# EAGLE board Applesiini (EAGLE 7.4.0)
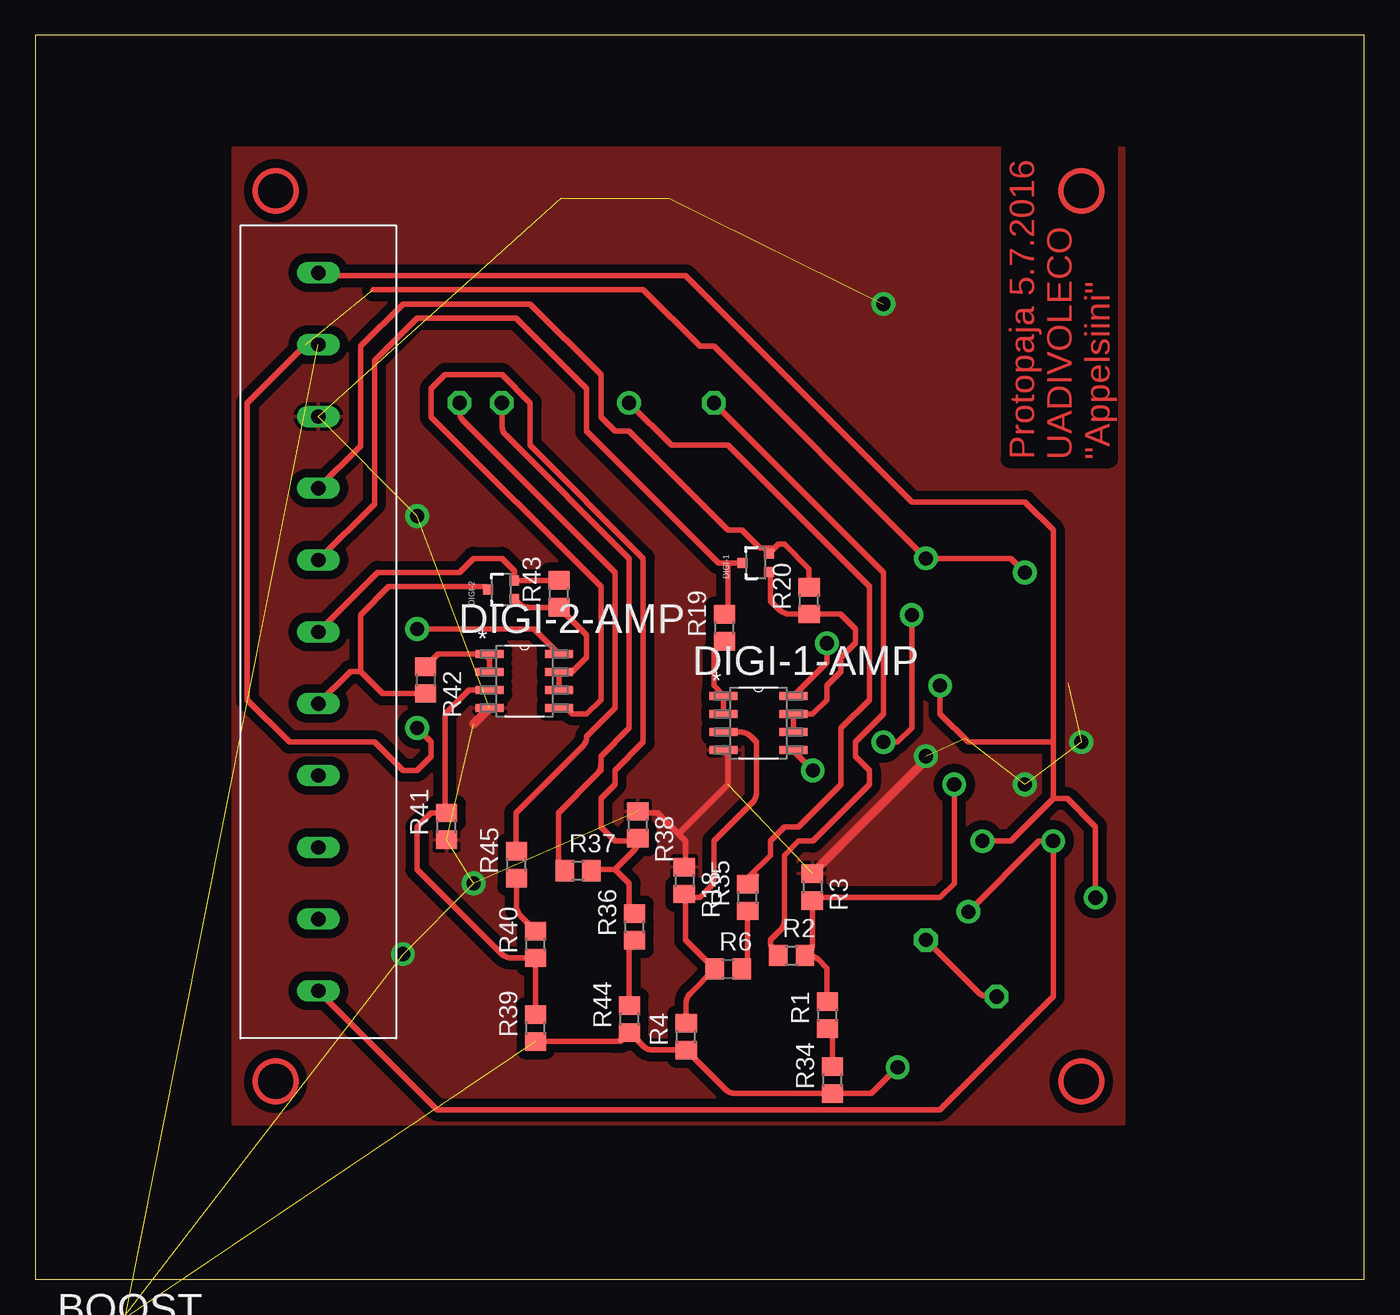
[diagram p0: board, top side]
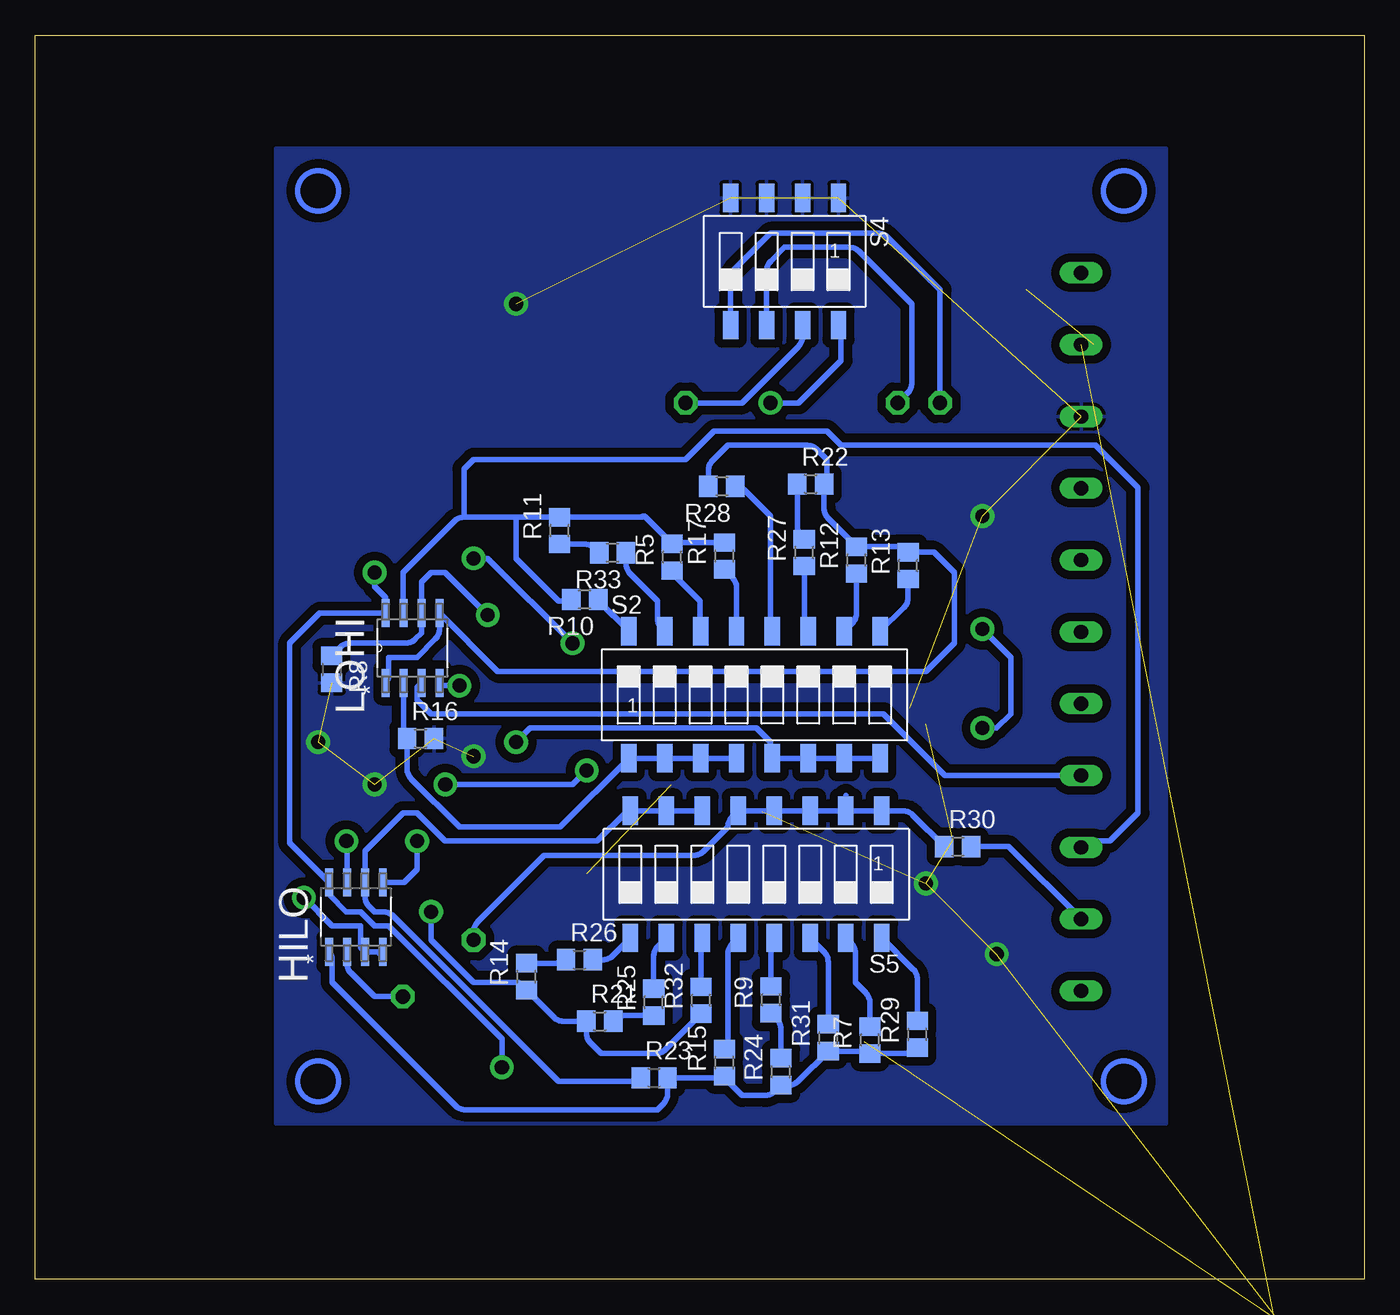
[diagram p1: board, bottom side, seen from below]

Size 94 x 88 mm. Coordinates in mm from the lower left corner, seen from the top.
Outline: 0,0 94,0 94,88 0,88 0,0
Copper layers (1*16): Top 0.035mm / dielectric 1.5mm / Bottom 0.035mm
Design rules "default": minimum track width 10mil, minimum drill 24mil, track to track 8mil, track to pad 8mil, pad to pad 8mil, via to via 8mil, smd to smd 8mil, copper to edge 40mil, drill to drill 8mil, minimum pad ring 10mil, minimum via ring 8mil, stop-mask expansion 4mil, vias tented up to drill 0mil, thermal gap 10mil

## Footprints (pad centres in the part's own frame; a part is rotated, then mirrored left to right if it is on the bottom)
SON65P210X210X80-7N = smd 0.61 x 0.356: 1 -1.041,0.66; 2 -1.041,0; 3 -1.041,-0.66; 4 1.041,-0.66; 5 1.041,0; 6 1.041,0.66 | smd 0.991 x 1.6: 7 0,0
C1206 = smd 1.6 x 1.8: 1 -1.4,0; 2 1.4,0
C0805 = smd 1.3 x 1.5: 1 -0.95,0; 2 0.95,0
SOD123 = smd 1.4 x 1.4: A 1.9,0; C -1.9,0
SOT323 = smd 0.7 x 0.7: 1 -0.65,-0.925; 2 0.65,-0.925; 3 0,0.925
SOIC127P600X175-8N = smd 1.981 x 0.559: 1 -2.464,1.905; 2 -2.464,0.635; 3 -2.464,-0.635; 4 -2.464,-1.905; 5 2.464,-1.905; 6 2.464,-0.635; 7 2.464,0.635; 8 2.464,1.905
SRN6045 = smd 2.5 x 6: 1 -2.175,-0.175; 2 2.125,-0.175
R0805 = smd 1.3 x 1.5: 1 -0.95,0; 2 0.95,0
SMS-008 = smd 1.092 x 2.007: 1 -8.89,-4.496; 2 -6.35,-4.496; 3 -3.81,-4.496; 4 -1.27,-4.496; 5 1.27,-4.496; 6 3.81,-4.496; 7 6.35,-4.496; 8 8.89,-4.496; 9 8.89,4.496; 10 6.35,4.496; 11 3.81,4.496; 12 1.27,4.496; 13 -1.27,4.496; 14 -3.81,4.496; 15 -6.35,4.496; 16 -8.89,4.496
SMS-004 = smd 1.092 x 2.007: 1 -3.81,-4.496; 2 -1.27,-4.496; 3 1.27,-4.496; 4 3.81,-4.496; 5 3.81,4.496; 6 1.27,4.496; 7 -1.27,4.496; 8 -3.81,4.496
10KPL508 = drill 1 long: P$1 -20.32,0; P$2 -15.24,0; P$3 -10.16,0; P$4 -5.08,0; P$5 0,0; P$6 5.08,0; P$7 10.16,0; P$8 15.24,0; P$9 20.32,0; P$10 25.4,0; P$11 -25.4,0

## Placement (x,y rotation side)
BOOST  TPS61170DRVT  [SON65P210X210X80-7N]  5,-5 0 top  (outside the outline)
C1  [C1206]  3,-13 0 top  (outside the outline)
C2  [C0805]  2,-17 0 top  (outside the outline)
C3  [C1206]  3,-21 0 top  (outside the outline)
C4  [C1206]  3,-25 0 top  (outside the outline)
C5  [C0805]  2,-29 0 top  (outside the outline)
D1  [SOD123]  -5,-45 0 top  (outside the outline)
DIGI-1  MOSFET-NCHANNEL2N7002PW  [SOT323]  50.96,50.68 90 top
DIGI-1-AMP  LM358DR  [SOIC127P600X175-8N]  51.15,39.35 0 top
DIGI-2  MOSFET-NCHANNEL2N7002PW  [SOT323]  32.96,48.79 90 top
DIGI-2-AMP  LM358DR  [SOIC127P600X175-8N]  34.6,42.32 0 top
HILO  LM358DR  [SOIC127P600X175-8N]  71.32,25.63 90 bottom
L1  22uH  [SRN6045]  -4,-36 0 top  (outside the outline)
LOHI  LM358DR  [SOIC127P600X175-8N]  67.32,44.66 90 bottom
R1  1k  [R0805]  56.04,18.69 90 top
R2  15k4  [R0805]  53.49,22.91 0 top
R3  10k  [R0805]  54.96,27.75 270 top
R4  10k  [R0805]  46.04,17.17 90 top
R5  30k  [R0805]  48.96,51.09 90 bottom
R6  9k1  [R0805]  49.01,21.96 0 top
R7  7k5  [R0805]  34.96,16.93 90 bottom
R8  10k  [R0805]  73.04,43.15 270 bottom
R9  8k2  [R0805]  41.96,19.77 90 bottom
R10  120k  [R0805]  55.14,48.09 180 bottom
R11  56k  [R0805]  56.91,52.96 90 bottom
R12  30k  [R0805]  35.91,50.88 90 bottom
R13  20  [R0805]  32.26,50.49 90 bottom
R14  1k  [R0805]  59.26,21.41 90 bottom
R15  30k  [R0805]  45.26,15.33 90 bottom
R16  10k  [R0805]  66.75,38.26 0 bottom
R17  24k  [R0805]  45.26,51.17 90 bottom
R18  240k  [R0805]  45.91,28.21 270 top
R19  10k  [R0805]  48.74,46.09 90 top
R20  10k  [R0805]  54.74,48.01 90 top
R21  3k9  [R0805]  54.07,18.26 0 bottom
R22  3k  [R0805]  39.15,56.26 0 bottom
R23  10k  [R0805]  50.23,14.26 0 bottom
R24  390  [R0805]  41.26,14.69 90 bottom
R25  56k  [R0805]  50.26,19.61 90 bottom
R26  39k  [R0805]  55.51,22.61 0 bottom
R27  47k  [R0805]  39.61,51.41 90 bottom
R28  110k  [R0805]  45.44,56.09 180 bottom
R29  15k  [R0805]  31.61,17.33 90 bottom
R30  10k  [R0805]  28.75,30.61 0 bottom
R31  120k  [R0805]  37.91,17.09 90 bottom
R32  120k  [R0805]  46.91,19.74 90 bottom
R33  3k9  [R0805]  53.17,51.39 180 bottom
R34  39k  [R0805]  56.39,14.09 90 top
R35  300  [R0805]  50.39,27.01 90 top
R36  1k  [R0805]  42.39,24.93 90 top
R37  15k4  [R0805]  38.39,28.91 0 top
R38  10k  [R0805]  42.61,32.15 270 top
R39  10k  [R0805]  35.39,17.77 90 top
R40  9k1  [R0805]  35.39,23.69 90 top
R41  240k  [R0805]  29.09,32.04 90 top
R42  10k  [R0805]  27.61,42.39 270 top
R43  10k  [R0805]  37.04,48.49 90 top
R44  39k  [R0805]  42.04,18.41 90 top
R45  300  [R0805]  34.04,29.33 90 top
R46  [R0805]  2,-33 0 top  (outside the outline)
R47  [R0805]  2,-37 0 top  (outside the outline)
R48  [R0805]  2,-41 0 top  (outside the outline)
S2  SWS008  [SMS-008]  43.13,41.35 0 bottom
S4  SWS004  [SMS-004]  41,72 180 bottom
S5  SWS008  [SMS-008]  43.01,28.65 180 bottom
U$1  5.08PITCHTERMINAL  [10KPL508]  20.02,45.8 270 top

## Library data of the parts
BOOST = Texas Instruments_By_element14_Batch_1; MPN: TPS61170DRVT; OC_FARNELL: 1703404; OC_NEWARK: 65M6342; PACKAGE: SON-6; SUPPLIER: Texas Instruments
C1-C5 R1-R48 = rcl
D1 = diode
DIGI-1 DIGI-2 = SparkFun-DiscreteSemi; PROD_ID: TRANS-11151
DIGI-1-AMP DIGI-2-AMP HILO LOHI = Texas Instruments_By_element14_Batch_1; MPN: LM358DR; OC_FARNELL: 1831865; OC_NEWARK: 34K7599; PACKAGE: SOIC-8; SUPPLIER: Texas Instruments
L1 = SparkFun-Passives; PROD_ID: NDUC-11627
S2 S4 S5 = smd-special
U$1 = ruuviliitin

## Nets
+5V: BOOST.5 BOOST.6 C2.1 L1.2 U$1.P$1
A_HI-LO_IN: R30.2 U$1.P$9
A_HI-LO_OUT: HILO.7 R14.1 R21.1 R32.1 U$1.P$10
A_LO-HI_IN: LOHI.3 U$1.P$7
A_LO-HI_OUT: LOHI.7 R5.2 R10.2 R11.2 R17.2 U$1.P$8
DI-1: DIGI-1-AMP.1 DIGI-1-AMP.2 R19.1
DIGI_HIGH_1: DIGI-1.3 R19.2 U$1.P$4
DIGI_HIGH_2: DIGI-2.3 R42.2 U$1.P$6
DIGI_LOW_1: DIGI-1.2 R20.2 U$1.P$3
DIGI_LOW_2: DIGI-2.2 R43.2 U$1.P$5
GND: BOOST.3 C1.2 C2.2 C3.2 C4.2 C5.2 DIGI-1-AMP.4 DIGI-2-AMP.4 R3.1 R8.2 R16.2 R18.1 R38.1 R41.1 R46.2 S4.1 S4.2 S4.3 S4.4 U$1.P$2
N$2: DIGI-1-AMP.3 R4.2 R6.1 R18.2
N$4: R2.1 S4.7
N$5: R6.2 R35.1
N$6: DIGI-1-AMP.5 R1.2 R2.2 R3.2
N$8: DIGI-1-AMP.6 DIGI-1-AMP.7 DIGI-1.1 R20.1
N$9: DIGI-2-AMP.5 R36.2 R37.2 R38.2
N$10: HILO.2 R30.1 S5.1 S5.2 S5.3 S5.4 S5.5
N$11: DIGI-2-AMP.3 R39.2 R40.1 R41.2
N$13: R10.1 S2.16
N$14: R33.1 S2.15
N$15: R1.1 R34.2
N$16: R5.1 S2.14
N$17: R17.1 S2.13
N$18: R28.1 S2.12
N$19: R27.1 S2.11
N$20: R12.1 S2.10
N$21: R13.1 S2.9
N$22: R29.2 S5.16
N$23: LOHI.1 LOHI.5 R12.2 R13.2 R22.2 R28.2
N$24: R7.2 S5.15
N$26: R31.2 S5.14
N$27: R9.2 S5.13
N$28: R15.2 S5.12
N$29: R32.2 S5.11
N$30: HILO.6 R23.1 S5.6 S5.7 S5.8
N$31: R25.2 S5.10
N$32: R26.2 S5.9
N$34: R14.2 R26.1
N$36: R21.2 R25.1
N$37: R9.1 R24.2
N$38: R22.1 R27.2
N$41: R11.1 R33.2
N$42: R35.2 S4.8
N$44: BOOST.4 D1.A L1.1
N$46: LOHI.2 R16.1 S2.1 S2.2 S2.3 S2.4
N$47: D1.C R47.2
N$49: BOOST.2 R48.2
N$50: LOHI.6 R8.1 S2.5 S2.6 S2.7 S2.8
N$51: C5.1 R48.1
N$63: DIGI-2-AMP.1 DIGI-2-AMP.2 R42.1
N$64: DIGI-2-AMP.6 DIGI-2-AMP.7 DIGI-2.1 R43.1
N$67: R37.1 S4.6
N$68: R36.1 R44.2
N$69: R40.2 R45.1
N$70: R45.2 S4.5
OUT1: HILO.1 R7.1 R15.1 R23.2 R24.1 R29.1 R31.1
VCC: BOOST.1 C1.1 C3.1 C4.1 DIGI-1-AMP.8 DIGI-2-AMP.8 HILO.8 LOHI.8 R4.1 R34.1 R39.1 R44.1 R46.1 R47.1
VDD: HILO.3 HILO.4 HILO.5 LOHI.4 U$1.P$11

## Tracks (layer width: path | path; a pad name or v marks a point on that pad's centre or on a via)
+5V  (4 unrouted)
A_HI-LO_IN
  Bottom 0.406: U$1.P$9 25.15,30.61 R30.2
A_HI-LO_OUT  (via drill 1 pad 1.68)
  Top 0.406: v66,26 71,31 v72,31 72,20 64,12 28.42,12 U$1.P$10
  Bottom 0.406: R32.1 49.49,16.21 arc45 50,16 54,16 54.73,16.73 arc45 55.02,17.43 R21.1 56.65,18.26 arc45 57.35,18.55 R14.1 59.8,21 63,21 66,24 v66,26 | v72,31 71.95,30.95 HILO.7
A_LO-HI_IN
  Bottom 0.406: LOHI.3 67,41.88 67,41 66,40 34,40 29.64,35.64 U$1.P$7
A_LO-HI_OUT
  Bottom 0.406: LOHI.7 arc45 68,47.23 68,50 64.38,53.62 arc45 63.68,53.91 | 63.68,53.91 60,53.91 | 60,53.91 R11.2 51.22,53.91 arc-45 51,54 arc45 50.86,53.94 R5.2 arc45 48.77,52.12 R17.2 | R10.2 arc45 56.31,48 57,48 60,51 60,53.91 | U$1.P$8 19.58,31 18,31 16,33 16,56 19,59 37,59 38,60 46,60 48,58 63,58 63.68,57.32 63.68,53.91
DI-1
  Top 0.406: R19.1 48,44.4 48,42 48.69,41.31 DIGI-1-AMP.1 DIGI-1-AMP.2
DIGI_HIGH_1
  Top 0.406: U$1.P$4 24,54.86 24,65 27,68 34,68 39,63 39,60 48.32,50.68 49,50.68 | 49,50.68 DIGI-1.3 | R19.2 49,47.3 49,50.68
DIGI_HIGH_2
  Top 0.406: DIGI-2.3 31.82,49 25,49 23,47 23,43 | 23,43 24.56,41.44 R42.2 | U$1.P$6 22.3,43 23,43
DIGI_LOW_1
  Top 0.406: DIGI-1.2 52.28,51.72 | 52.28,51.72 52.55,52 53,52 54.74,50.26 R20.2 | U$1.P$3 23,58.94 23,66 26,69 29,69 30,69 35,69 40,64 40,61 41,60 42,60 49,53 50,53 51.28,51.72 52.28,51.72
DIGI_LOW_2
  Top 0.406: R43.2 DIGI-2.2 33.89,50.12 33,51 31,51 30,50 24.22,50 U$1.P$5
GND  (via drill 1 pad 1.68)  (23 unrouted)
  Top 0.406: R38.1 42.71,33 44,33 45.5,31.5 | 45.5,31.5 46,31 46,29 45.91,29.09 R18.1 | DIGI-1-AMP.4 49,37.13 49,35 45.5,31.5
  Top 0.61: DIGI-2-AMP.4 31,39.28 | R3.1 63,36.74 v63,37
  other vias: 26,23 31,28 74,38 60,69 70,35 27,54
  pour Top (isolate 0.61, rank 6): 14,80 14,11 77,11 77,80
  pour Bottom (isolate 0.61): 14,80 14,11 77,11 77,80
N$2
  Top 0.406: R4.2 46.04,19.53 arc-45 46.33,20.23 R6.1 arc-45 48.03,21.97 46,24 46,27.04 arc45 R18.2 arc45 46.54,27 47,27 47.71,27.71 arc45 48,28.41 48,31 50.71,33.71 arc45 51,34.41 51,38 50.58,38.42 arc45 49.87,38.72 DIGI-1-AMP.3
N$4  (via drill 1 pad 1.68)
  Top 0.406: R2.1 52.29,23.16 arc-45 52,23.86 52,24 52.71,24.71 arc45 53,25.41 53,30 54,31 55,31 59,35 59,36 58,37 58,38 60,40 60,50 v48,62
  Bottom 0.406: v48,62 44,62 40.02,65.98 arc-45 39.73,66.68 S4.7
N$5
  Top 0.406: R6.2 50.1,22.1 arc45 50.39,22.8 R35.1
N$6  (via drill 1 pad 1.68)
  Top 0.406: R1.2 arc-45 56,19.74 56,22 55.38,22.62 arc45 54.68,22.91 | 54.68,22.91 R2.2 | 54.68,22.91 arc45 54.96,23.6 R3.2 55.16,27 64,27 65,28 v65,35 | v55,36 53.61,37.39 DIGI-1-AMP.5
  Bottom 0.406: v65,35 56,35 v55,36
N$8
  Top 0.406: DIGI-1.1 arc-45 52,49.75 52,48 52.65,47.35 arc45 53.35,47.06 R20.1 56.94,47.06 58,46 58,45 57,44 57,43 56,42 56,41 54.98,39.98 DIGI-1-AMP.7 | 54.57,39.98 DIGI-1-AMP.7 | DIGI-1-AMP.6 DIGI-1-AMP.7
N$9
  Top 0.406: R37.2 arc-45 39.56,29 41,29 | 41,29 42.32,30.32 arc45 42.61,31.02 R38.2 42.41,31 41,31 40,32 40,34 41,35 41,36 43,38 43,51 35,59 35,62 33,64 29,64 28,63 28,61 40,49 40,41 39,40 38,40 37.59,40.41 DIGI-2-AMP.5 | R36.2 42.29,25.98 arc-45 42,26.68 42,28 41,29
N$10  (via drill 1 pad 1.68)
  Top 0.406: v63,24 66.71,20.29 arc45 67.41,20 v68,20
  Bottom 0.406: S5.2 S5.1 32.65,33.15 arc45 31.94,32.85 R30.1 | S5.2 S5.3 S5.4 S5.5 44.71,32.72 arc-45 45,32.01 45.99,31.02 arc-45 46,31 46.71,30.29 arc45 47.41,30 58,30 62.71,25.29 arc-45 63,24.59 v63,24 | 36.66,34.24 S5.2 | v68,20 70,20 71.66,21.66 arc45 71.95,22.37 HILO.2
N$11
  Top 0.406: 35.71,19.04 R39.2 R40.1 | 29.07,33 arc-45 R41.2 arc45 29.07,33 | 29.07,33 28,33 27,32 27,29 32.97,23.03 arc45 33.67,22.74 R40.1 | R40.1 35.22,22.91 arc45 35,23 | 29.07,33 arc-45 29,33.16 29,40 30.68,41.69 DIGI-2-AMP.3
N$13
  Bottom 0.406: S2.16 54.14,47.96 arc45 R10.1
N$14
  Bottom 0.406: S2.15 49.71,46.07 arc45 50,46.78 50,48 51.93,49.93 arc45 52.22,50.63 R33.1
N$15
  Top 0.406: R1.1 56.1,17.68 arc-45 56.39,16.98 R34.2
N$16
  Bottom 0.406: S2.14 arc45 47,45.99 47,48 48.83,49.83 arc45 R5.1
N$17
  Bottom 0.406: R17.1 44.69,49.65 arc45 44.4,48.95 S2.13
N$18
  Bottom 0.406: S2.12 arc45 42,46.18 42,54 43.81,55.81 arc-45 R28.1
N$19
  Bottom 0.406: S2.11 arc45 39.61,46.55 R27.1
N$20
  Bottom 0.406: S2.10 36.2,46.42 arc-45 35.91,47.13 R12.1
N$21
  Bottom 0.406: S2.9 32.55,47.53 arc-45 32.26,48.24 R13.1
N$22
  Bottom 0.406: S5.16 31.9,21.94 arc45 31.61,21.23 R29.2
N$23
  Bottom 0.406: R28.2 46.39,57.2 arc45 46.1,57.9 45,59 39.41,59 arc45 38.71,58.71 38,58 38,56.74 arc45 R22.2 38.2,54.53 arc-45 37.91,53.83 R12.2 33.06,51.83 arc45 32.36,51.54 R13.2 30.44,51.44 29,50 29,45 31,43 61.29,43 LOHI.5 65.41,46 arc45 65.71,45.29 67,44 69,44 69,42.74 arc45 LOHI.1
N$24
  Bottom 0.406: S5.15 36.29,23.79 arc45 36,23.08 36,21 35.25,20.25 arc45 34.96,19.55 R7.2
N$26
  Bottom 0.406: S5.14 38.2,23.16 arc45 37.91,22.45 R31.2
N$27
  Bottom 0.406: S5.13 arc-45 41.96,23.62 R9.2
N$28
  Bottom 0.406: S5.12 44.71,23.73 arc-45 45,23.02 45,16 45.25,16.25 arc45 R15.2
N$29
  Bottom 0.406: S5.11 arc-45 46.91,23.94 R32.2
N$30
  Bottom 0.406: S5.6 S5.7 S5.8 arc45 52.25,33 54.25,31 65,31 67,33 68,33 70.69,30.32 HILO.6 | 70.69,28.9 HILO.6 | R23.1 arc45 51.81,14 57,14 68.71,25.71 arc-45 69.41,26 70,26 70.39,26.39 arc45 70.69,27.1 HILO.6
N$31
  Bottom 0.406: S5.10 49.97,23.55 arc-45 50.26,22.84 R25.2
N$32
  Bottom 0.406: S5.9 53.15,22.9 arc45 53.86,22.61 R26.2
N$34
  Bottom 0.406: R26.1 arc-45 56.53,22.64 arc45 57.21,22.36 R14.2
N$36
  Bottom 0.406: R21.2 53.01,18.37 arc45 52.31,18.66 R25.1
N$37
  Bottom 0.406: R9.1 41.55,18.41 arc45 41.26,17.71 R24.2
N$38
  Bottom 0.406: R27.2 39.81,52.56 arc45 40.1,53.26 R22.1
N$41
  Bottom 0.406: R33.2 54.45,51.72 arc-45 55.15,52.01 R11.1
N$42  (via drill 1 pad 1.68)
  Top 0.406: 51,28.57 R35.2 50.39,28.39 52,30 52,31 53,32 54,32 57,35 57,39 59,41 59,49 49,59 45,59 v42,62
  Bottom 0.406: S4.8 37.19,67.19 37,67 37,65 40,62 v42,62
N$44  (2 unrouted)
N$46
  Bottom 0.406: S2.4 S2.3 S2.2 S2.1 56.87,32 64,32 67.41,35.41 arc45 67.7,36.11 R16.1 arc45 67.95,38.88 LOHI.2
N$47  (1 unrouted)
N$49  (1 unrouted)
N$50  (via drill 1 pad 1.68)
  Top 0.406: v60,38 61,38 62,39 v62,47
  Bottom 0.406: S2.8 S2.7 S2.6 S2.5 42,36.99 42,38 43,39 59,39 v60,38 | R8.1 72.43,44.71 arc45 71.73,45 67.83,45 arc-45 67.12,45.29 66.69,45.73 LOHI.6 66.69,49.31 66,50 65,50 v62,47
N$51  (1 unrouted)
N$63
  Top 0.406: 32,44 32.07,44.07 arc45 DIGI-2-AMP.1 | DIGI-2-AMP.2 DIGI-2-AMP.1 | R42.1 28.49,44.23 DIGI-2-AMP.1
N$64
  Top 0.406: DIGI-2.1 34.19,47.83 arc45 34.9,47.54 R43.1 39,45.58 39,44 37.95,42.95 DIGI-2-AMP.7 DIGI-2-AMP.6
N$67  (via drill 1 pad 1.68)
  Top 0.406: R37.1 37.29,29.06 arc-45 37,29.76 37,33 39.71,35.71 | 39.71,35.71 arc45 40,36.41 | v33,62 33,60.41 arc45 33.29,59.71 42,51 42,39 40,37 40,36 39.71,35.71
  Bottom 0.406: v33,62 32.29,62.71 arc-45 32,63.41 32,69 35.71,72.71 arc-45 36.41,73 41,73 41.98,72.02 arc-45 42.27,71.32 S4.6
N$68
  Top 0.406: 42.39,19.71 R44.2 42.04,19.9 arc45 42,20 42,23.18 arc-45 42.29,23.88 R36.1
N$69
  Top 0.406: R40.2 34.33,25.7 arc-45 34.04,26.4 R45.1
N$70  (via drill 1 pad 1.68)
  Top 0.406: R45.2 arc-45 34,30.38 34,33 38.71,37.71 arc45 39,38.41 41,40.41 41,50 39,52 38.5,52.5 30.29,60.71 arc-45 30,61.41 v30,62
  Bottom 0.406: v30,62 30,70 33.71,73.71 arc-45 34.41,74 42,74 44.52,71.48 arc-45 44.81,70.78 S4.5
OUT1
  Bottom 0.406: R29.1 31.72,16.27 arc45 32.42,15.98 R7.1 arc-45 35.35,16.14 R31.1 40.02,14.03 arc45 40.72,13.74 R24.1 41.71,13.29 arc45 42.41,13 44,13 45.17,14.18 arc45 R15.1 arc45 45.55,14.26 R23.2 49.28,13.13 arc45 49.57,12.43 50,12 63.59,12 arc45 64.29,12.29 73,21 73,22.62 arc-45 HILO.1
VCC  (via drill 1 pad 1.68)  (7 unrouted)
  Top 0.406: R44.1 41.4,16.82 | R44.1 41.69,17.11 arc-45 40.99,16.82 R39.1 | R44.1 42.99,16.51 arc45 43.69,16.22 R4.1 48.83,13.43 arc45 49.53,13.14 R34.1 59.14,13.14 v61,15 | DIGI-1-AMP.8 56,43.64 v56,45 | v70,50 69,51 v63,51 48,66 47,66 43,70 23.9,70 | DIGI-2-AMP.8 35.29,46 v27,46 | v27,39 28,38 28,37 27,36 26,36 24,38 18,38 15,41 15,62 19.12,66.12
  Bottom 0.406: v61,15 61,17 69,25 70,25 71,26 72,26 73.22,27.23 HILO.8 76,30.87 76,45 73.88,47.12 LOHI.8 69.22,48.23 70,49 v70,50 | v56,45 62,51 v63,51 | v27,46 25,44 25,40 26,39 v27,39
VDD  (via drill 1 pad 1.68)
  Top 0.406: 72,38 72,53 70,55 62,55 46,71 20.22,71 U$1.P$11 | 72,38 72,34 | 72,34 69,31 v67,31 | v64,42 64,40 66,38 72,38 | v75,27 75,32 73,34 72,34
  Bottom 0.406: v67,31 67,29 67.91,28.09 HILO.5 | LOHI.4 65.22,42 v64,42 | HILO.4 69.58,23 69.75,23.17 HILO.3 71,23.48 71,25 73,25 v75,27
(copper drawn outside any net)
  shapes: Bottom circle x4, Top circle x4

## Text on the board
Top: Protopaja 5.7.2016 / UADIVOLECO / "Appelsiini"